# Altium PCB AudioBoxAmpV3-2.PcbDoc
Units mil, origin at the board's own origin, x right, y up, seen from the top; angles counter-clockwise.
Board outline 3662 x 3693 mil, 2 copper layers (Top Layer, Bottom Layer); 218 components, 164 nets, 728 pads, 0 vias.
Unrouted connection lines stored in the file: 516.
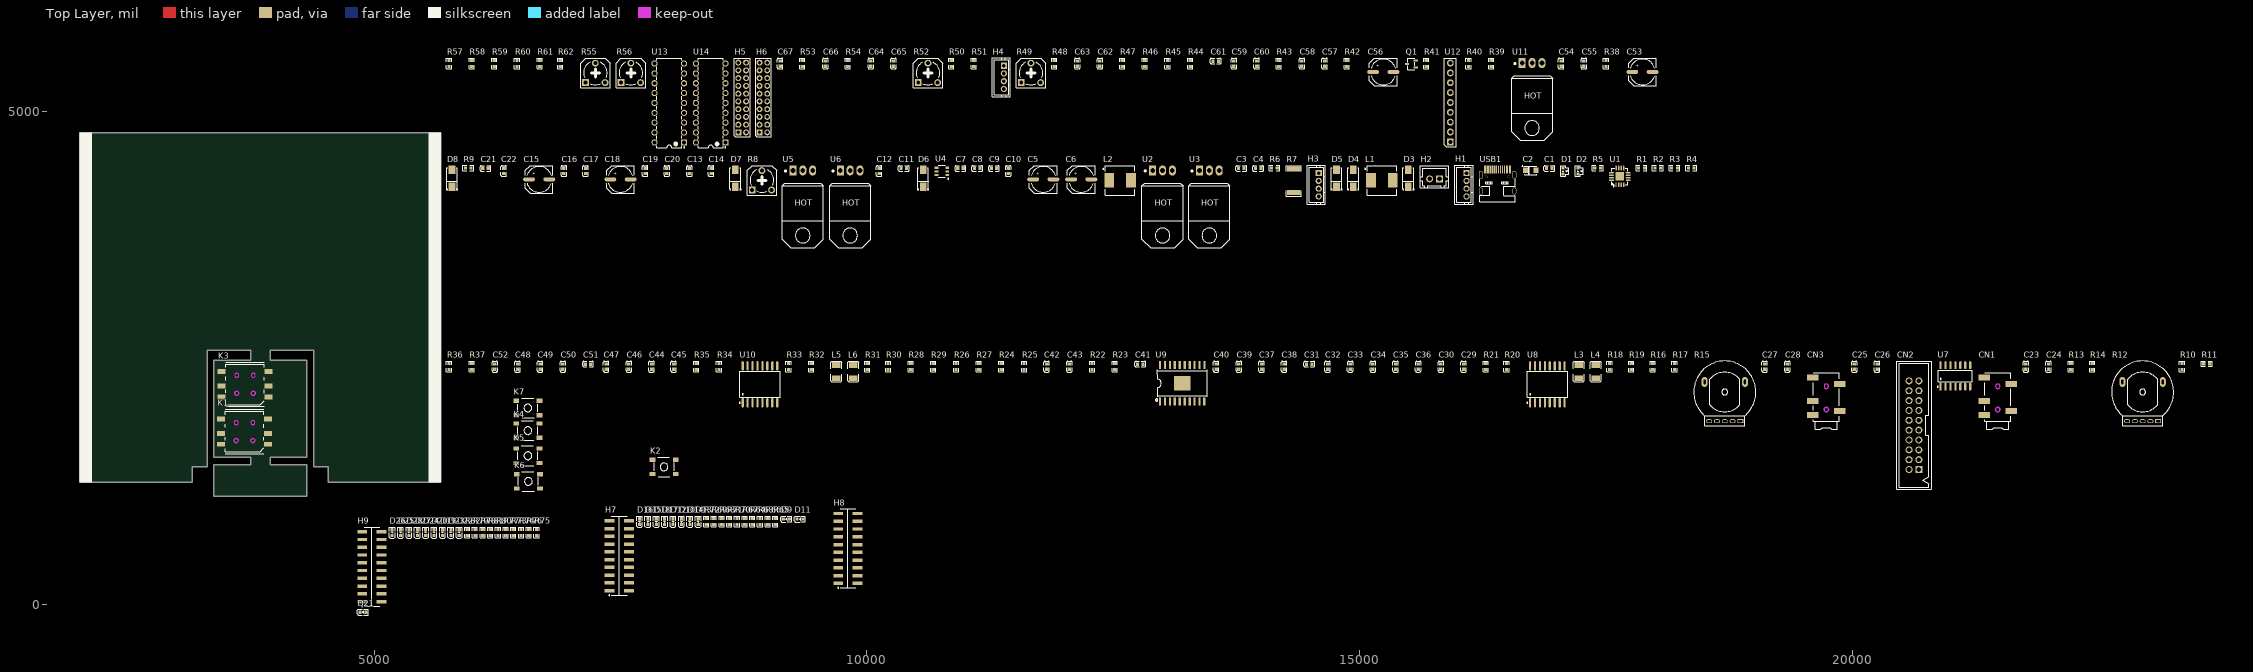
[diagram p0: Top Layer view]
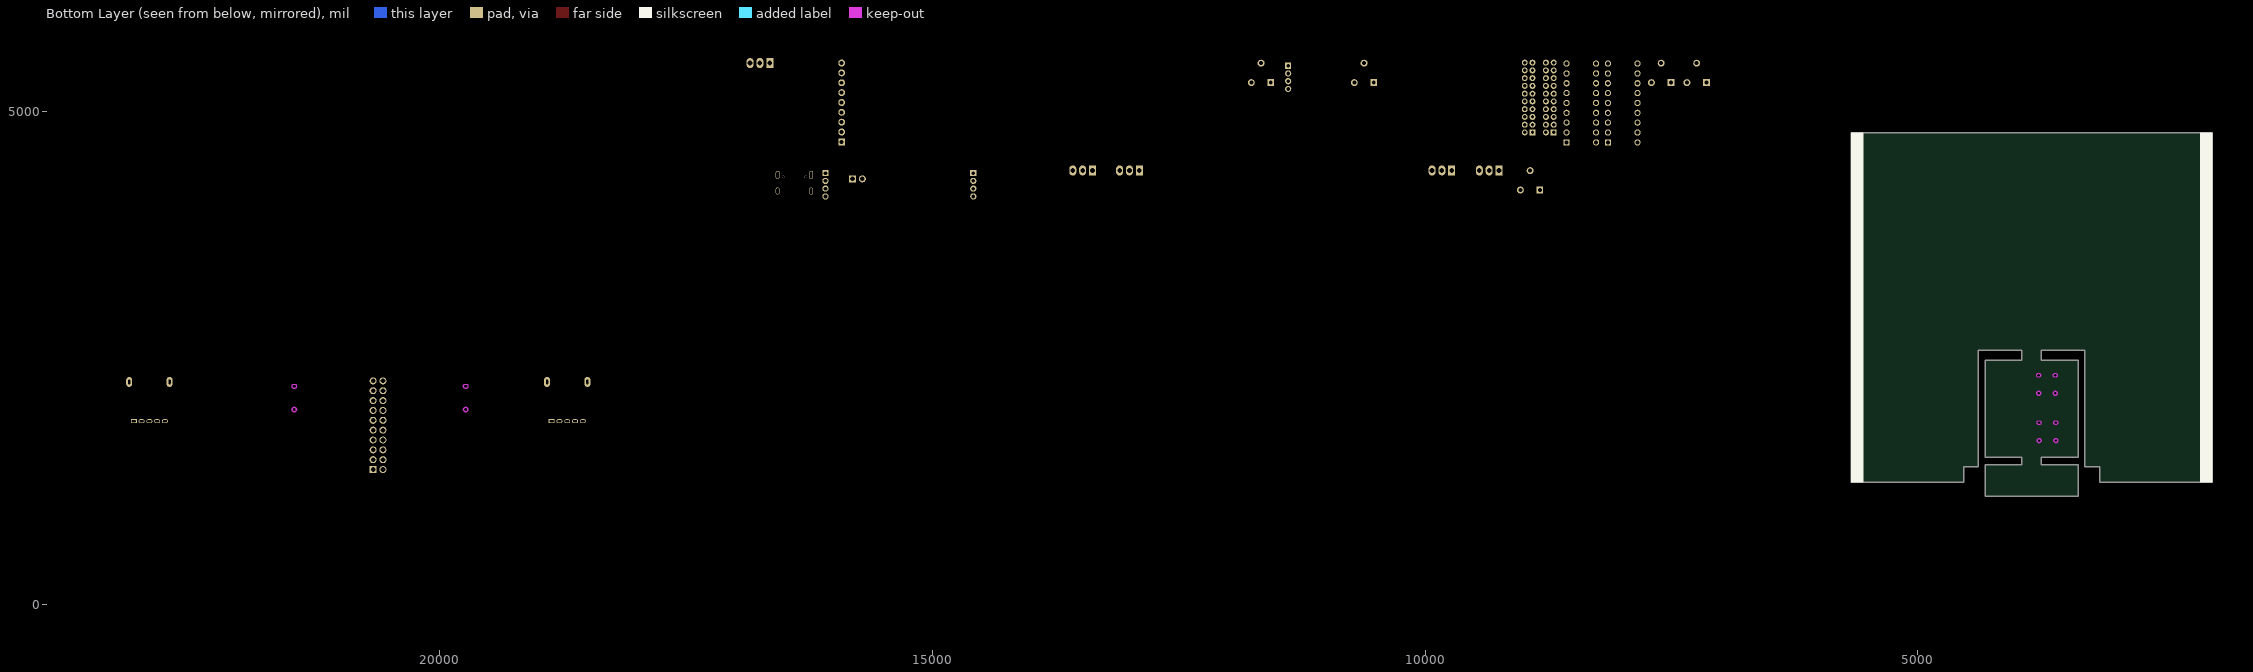
[diagram p1: Bottom Layer view, seen from below]

## Layer stack, top to bottom
Top Solder: solder mask 0.4, Solder Resist, Dk 3.5
Top Layer: signal copper 1.4
Dielectric 1: dielectric 12.6, FR-4, Dk 4.8
Bottom Layer: signal copper 1.4
Bottom Solder: solder mask 0.4, Solder Resist, Dk 3.5

## Board outline
2015,1240 3155,1240 3155,1400 3305,1400 3305,2581 3746,2581 3746,2481 3373.5,2481 3373.5,1497 3746,1497 3746,1417 3373.5,1417 3373.5,1097 4318.5,1097 4318.5,1417 3946,1417 3946,1497 4318.5,1497 4318.5,2481 3946,2481 3946,2581 4387,2581 4387,1400 4537,1400 4537,1240 5677,1240 5677,4790 2015,4790

## Design rules (kind name [scope] priority, off if disabled: settings)
Clearance [All] p1: gap=6 ignorepadtopadclearanceinfootprint=FALSE
PolygonConnect [All] p1: connectstyle=Relief reliefconductorwidth=10 reliefentries=4 polygonreliefangle="90 Angle" airgapwidth=10
RoutingVias [All] p1: holewidth=28 width=50 viastyle="Through Hole" minholewidth=28 minwidth=50 maxholewidth=28 maxwidth=50
SolderMaskExpansion [All] p1: expansion=4 istentingtop=FALSE
Width [All] p1: maxlimit=10 minlimit=10 preferedwidth=10
30 further rules are at their usual default settings.

## Classes and differential pairs
component class VU_LED: C53 C54 C55 C56 C57 C58 C59 C60 C61 C62 C63 C64 C65 C66 C67 H4 H5 H6 Q1 R38 R39 R40 R41 R42 R43 R44 R45 R46 R47 R48 R49 R50 R51 R52 R53 R54 R55 R56 R57 R58 R59 R60 R61 R62 U11 U12 U13 U14
component class Power: C1 C2 C3 C4 C5 C6 C7 C8 C9 C10 C11 C12 C13 C14 C15 C16 C17 C18 C19 C20 C21 C22 D1 D2 D3 D4 D5 D6 D7 D8 H1 H2 H3 L1 L2 R1 R2 R3 R4 R5 R6 R7 R8 R9 U1 U2 U3 U4 U5 U6 USB1
component class FrantPannel: D9 D10 D11 D12 D13 D14 D15 D16 D17 D18 D19 D20 D21 D22 D23 D24 D25 D26 D27 D28 H7 H8 H9 K1 K2 K3 K4 K5 K6 K7 R63 R64 R65 R66 R67 R68 R69 R70 R71 R72 R73 R74 R75 R76 R77 R78 R79 R80 R81 R82
component class Audio: C23 C24 C25 C26 C27 C28 C29 C30 C31 C32 C33 C34 C35 C36 C37 C38 C39 C40 C41 C42 C43 C44 C45 C46 C47 C48 C49 C50 C51 C52 CN1 CN2 CN3 L3 L4 L5 L6 R10 R11 R12 R13 R14 R15 R16 R17 R18 R19 R20 R21 R22 R23 R24 R25 R26 R27 R28 R29 R30 R31 R32 R33 R34 R35 R36 R37 U7 U8 U9 U10

## Components (designator, comment, footprint, x,y, rotation, side; value= is the part's Value field where it differs from the comment)
C1 "CAP" C0603 16925,4425 r0 top value=100nF
C2 "CAP_POL" CP1206 16735,4405 r0 top value=10uF
C3 "CAP" C0603 13800,4425 r0 top value=10uF
C4 "CAP" C0603 13970,4425 r0 top value=10uF
C5 "CAP_POL" CAP_SMD_6.3mm 11790,4315 r0 top value=220uF
C6 "CAP_POL" CAP_SMD_6.3mm 12175,4315 r0 top value=220uF
C7 "CAP" C0603 10950,4425 r0 top value=10uF
C8 "CAP" C0603 11120,4425 r0 top value=100nF
C9 "CAP" C0603 11290,4425 r0 top value=10uF
C10 "CAP" C0603 11435,4400 r90 top value=100nF
C11 "CAP" C0603 10375,4425 r0 top value=1uF
C12 "CAP" C0603 10125,4400 r90 top value=1uF
C13 "CAP" C0603 8200,4400 r90 top value=10uF
C14 "CAP" C0603 8420,4400 r90 top value=100nF
C15 "CAP_POL" CAP_SMD_6.3mm 6675,4315 r0 top value=220uF
C16 "CAP" C0603 6925,4400 r90 top value=10uF
C17 "CAP" C0603 7145,4400 r90 top value=100nF
C18 "CAP_POL" CAP_SMD_6.3mm 7500,4315 r0 top value=220uF
C19 "CAP" C0603 7750,4400 r90 top value=10uF
C20 "CAP" C0603 7970,4400 r90 top value=100nF
C21 "CAP" C0603 6130,4425 r0 top value=10uF
C22 "CAP" C0603 6315,4400 r90 top value=100nF
C23 "Cap" C0603 21760,2415 r90 top value=1nF
C24 "Cap" C0603 21990,2415 r90 top value=1nF
C25 "CAP" C0603 20020,2415 r90 top value=1uF
C26 "CAP" C0603 20250,2415 r90 top value=1uF
C27 "Cap" C0603 19110,2415 r90 top value=1nF
C28 "Cap" C0603 19340,2415 r90 top value=1nF
C29 "CAP" C0603 16055,2415 r90 top value=10uF
C30 "CAP" C0603 15825,2415 r90 top value=10uF
C31 "CAP" C0603 14490,2440 r0 top value=1uF
C32 "CAP" C0603 14675,2415 r90 top value=100nF
C33 "CAP" C0603 14905,2415 r90 top value=1uF
C34 "CAP" C0603 15135,2415 r90 top value=100nF
C35 "CAP" C0603 15365,2415 r90 top value=1uF
C36 "CAP" C0603 15595,2415 r90 top value=100nF
C37 "CAP" C0603 14005,2415 r90 top value=1uF
C38 "CAP" C0603 14235,2415 r90 top value=100nF
C39 "CAP" C0603 13775,2415 r90 top value=1uF
C40 "CAP" C0603 13545,2415 r90 top value=1uF
C41 "CAP" C0603 12775,2440 r0 top value=1uF
C42 "CAP" C0603 11825,2415 r90 top value=10uF
C43 "CAP" C0603 12055,2415 r90 top value=10uF
C44 "CAP" C0603 7815,2415 r90 top value=10uF
C45 "CAP" C0603 8040,2415 r90 top value=10uF
C46 "CAP" C0603 7585,2415 r90 top value=1uF
C47 "CAP" C0603 7355,2415 r90 top value=1uF
C48 "CAP" C0603 6455,2415 r90 top value=1uF
C49 "CAP" C0603 6685,2415 r90 top value=1uF
C50 "CAP" C0603 6915,2415 r90 top value=1uF
C51 "CAP" C0603 7170,2440 r0 top value=1uF
C52 "CAP" C0603 6225,2415 r90 top value=1uF
C53 "CAP_POL" CAP_SMD_6.3mm 17870,5405 r0 top value=100uF
C54 "CAP" C0603 17045,5490 r90 top value=10uF
C55 "CAP" C0603 17275,5490 r90 top value=2.2uF
C56 "CAP_POL" CAP_SMD_6.3mm 15240,5405 r0 top value=220uF
C57 "CAP" C0603 14645,5490 r90 top value=1uF
C58 "CAP" C0603 14415,5490 r90 top value=2.2uF
C59 "CAP" C0603 13725,5490 r90 top value=10uF
C60 "CAP" C0603 13955,5490 r90 top value=2.2uF
C61 "CAP" C0603 13540,5515 r0 top value=1nF
C62 "CAP" C0603 12365,5490 r90 top value=1nF
C63 "CAP" C0603 12135,5490 r90 top value=2.2uF
C64 "CAP" C0603 10040,5490 r90 top value=10uF
C65 "CAP" C0603 10270,5490 r90 top value=10uF
C66 "CAP" C0603 9580,5490 r90 top value=10uF
C67 "CAP" C0603 9120,5490 r90 top value=10uF
CN1 "Audio3.5Con" Audio3.5_3Pin 21475,2115 r90 top
CN2 "300S-20P" DC_20P_2.54 20625,1820 r90 top
CN3 "Audio3.5Con" Audio3.5_3Pin 19735,2115 r90 top
D1 "LED" LED0603_Side 17065,4400 r0 top
D2 "LED" LED0603_Side 17215,4400 r0 top
D3 "Diode SBD" SMA_L4.3 15495,4325 r90 top
D4 "Diode SBD" SMA_L4.3 14935,4325 r90 top
D5 "Diode SBD" SMA_L4.3 14765,4325 r90 top
D6 "Diode SBD" SMA_L4.3 10570,4325 r90 top
D7 "Diode SBD" SMA_L4.3 8665,4325 r90 top
D8 "Diode SBD" SMA_L4.3 5790,4325 r90 top
D9 "LED" LED0603 9182.61,867.26 r0 top
D10 "LED" LED0603 8118.43,842.3 r90 top
D11 "LED" LED0603 9321.91,867.26 r0 top
D12 "LED" LED0603 8033.37,842.3 r90 top
D13 "LED" LED0603 8288.54,842.3 r90 top
D14 "LED" LED0603 8203.48,842.3 r90 top
D15 "LED" LED0603 7778.2,842.3 r90 top
D16 "LED" LED0603 7693.14,842.3 r90 top
D17 "LED" LED0603 7948.31,842.3 r90 top
D18 "LED" LED0603 7863.25,842.3 r90 top
D19 "LED" LED0603 5693.48,732.3 r90 top
D20 "LED" LED0603 5608.43,732.3 r90 top
D21 "LED" LED0603 4886.6,-77.74 r0 top
D22 "LED" LED0603 5863.6,732.3 r90 top
D23 "LED" LED0603 5778.54,732.3 r90 top
D24 "LED" LED0603 5523.37,732.3 r90 top
D25 "LED" LED0603 5268.2,732.3 r90 top
D26 "LED" LED0603 5183.14,732.3 r90 top
D27 "LED" LED0603 5438.31,732.3 r90 top
D28 "LED" LED0603 5353.25,732.3 r90 top
H1 "Header_P4" PH_4Pin 16085,4260 r90 top
H2 "Header_P2" XH_2Pin 15760,4320 r0 top
H3 "Header_P4" PH_4Pin 14585,4260 r90 top
H4 "Header_P4" PH_4Pin 11390,5350 r90 top
H5 "Header_2*10P" H_2.0_10x2Pin 8735,5145 r90 top
H6 "Header_2*10P" H_2.0_10x2Pin 8950,5145 r90 top
H7 "Header_2*10P" H_2.0_2x10Pin_SMD 7487.7,495 r90 top
H8 "Header_2*10P" H_2.0_2x10Pin_SMD 9807.7,570 r90 top
H9 "Header_2*10P" H_2.0_2x10Pin_SMD 4977.7,385 r90 top
K1 "KEY_5P" KEY_5 3685,1755 r180 top
K2 "KEY_4P" KEY_4 7941.89,1397.16 r180 top
K3 "KEY_5P" KEY_5 3690,2235 r180 top
K4 "KEY_4P" KEY_4 6560,1765 r180 top
K5 "KEY_4P" KEY_4 6560,1510 r180 top
K6 "KEY_4P" KEY_4 6565,1250 r180 top
K7 "KEY_4P" KEY_4 6560,1995 r0 top
L1 "INDU" SMD_L7.1 15225,4305 r0 top
L2 "INDU" SMD_L7.1 12570,4305 r0 top
L3 "INDU" L1210 17225,2365 r90 top
L4 "INDU" L1210 17395,2365 r90 top
L5 "INDU" L1210 9690,2365 r90 top
L6 "INDU" L1210 9860,2365 r90 top
Q1 "SS8050" SOT-23-3 15525,5485 r0 top
R1 "Reg" R0603 17860,4430 r0 top value=1K
R2 "Reg" R0603 18025,4430 r0 top value=10K
R3 "Reg" R0603 18195,4430 r0 top value=1K
R4 "Reg" R0603 18365,4430 r0 top value=10K
R5 "Reg" R0603 17415,4430 r0 top value=320K
R6 "Reg" R0603 14135,4430 r0 top value=1K
R7 "Reg" R2512 14330,4300 r90 top value=0.05R
R8 "Res Tap" RES_TAP_HOR 8935,4305 r0 top value=10K
R9 "Reg" R0603 5955,4430 r0 top value=300R
R10 "Reg" R0603 23345,2415 r90 top value=1K
R11 "Reg" R0603 23595,2445 r0 top value=1K
R12 "Res_Tap_2" RES_TAP_5Pin 22945,2060 r0 top
R13 "Reg" R0603 22215,2415 r90 top value=500R
R14 "Reg" R0603 22435,2415 r90 top value=500R
R15 "Res_Tap_2" RES_TAP_5Pin 18705,2060 r0 top
R16 "Reg" R0603 17975,2415 r90 top value=500R
R17 "Reg" R0603 18195,2415 r90 top value=500R
R18 "Reg" R0603 17535,2415 r90 top value=1K
R19 "Reg" R0603 17755,2415 r90 top value=1K
R20 "Reg" R0603 16490,2415 r90 top value=5K
R21 "Reg" R0603 16280,2415 r90 top value=5K
R22 "Reg" R0603 12285,2415 r90 top value=10K
R23 "Reg" R0603 12515,2415 r90 top value=10K
R24 "Reg" R0603 11365,2415 r90 top value=50R
R25 "Reg" R0603 11595,2415 r90 top value=50R
R26 "Reg" R0603 10905,2415 r90 top value=500R
R27 "Reg" R0603 11135,2415 r90 top value=500R
R28 "Reg" R0603 10445,2415 r90 top value=500R
R29 "Reg" R0603 10675,2415 r90 top value=500R
R30 "Reg" R0603 10215,2415 r90 top value=1K
R31 "Reg" R0603 10005,2415 r90 top value=1K
R32 "Reg" R0603 9435,2415 r90 top value=1K
R33 "Reg" R0603 9205,2415 r90 top value=1K
R34 "Reg" R0603 8500,2415 r90 top value=5K
R35 "Reg" R0603 8270,2415 r90 top value=5K
R36 "Reg" R0603 5760,2415 r90 top value=10K
R37 "Reg" R0603 5990,2415 r90 top value=10K
R38 "Reg" R0603 17500,5490 r90 top value=680K
R39 "Reg" R0603 16335,5490 r90 top value=10K
R40 "Reg" R0603 16105,5490 r90 top value=10K
R41 "Reg" R0603 15675,5490 r90 top value=330K
R42 "Reg" R0603 14870,5490 r90 top value=330K
R43 "Reg" R0603 14180,5490 r90 top value=10K
R44 "Reg" R0603 13280,5490 r90 top value=220K
R45 "Reg" R0603 13050,5490 r90 top value=10K
R46 "Reg" R0603 12820,5490 r90 top value=100R
R47 "Reg" R0603 12590,5490 r90 top value=220K
R48 "Reg" R0603 11900,5490 r90 top value=10K
R49 "Res Tap" RES_TAP_HOR 11665,5395 r0 top value=1K
R50 "Reg" R0603 10855,5490 r90 top value=1K
R51 "Reg" R0603 11085,5490 r90 top value=100R
R52 "Res Tap" RES_TAP_HOR 10620,5395 r0 top value=1K
R53 "Reg" R0603 9345,5490 r90 top value=10K
R54 "Reg" R0603 9805,5490 r90 top value=10K
R55 "Res Tap" RES_TAP_HOR 7245,5395 r0 top value=50K
R56 "Res Tap" RES_TAP_HOR 7605,5395 r0 top value=50K
R57 "Reg" R0603 5760,5490 r90 top value=20K
R58 "Reg" R0603 5990,5490 r90 top value=500R
R59 "Reg" R0603 6220,5490 r90 top value=1K
R60 "Reg" R0603 6450,5490 r90 top value=20K
R61 "Reg" R0603 6680,5490 r90 top value=500R
R62 "Reg" R0603 6890,5490 r90 top value=1K
R63 "Reg" R0603 8915.98,842.47 r90 top value=1K
R64 "Reg" R0603 8837.96,842.47 r90 top value=1K
R65 "Reg" R0603 9072.01,842.47 r90 top value=1K
R66 "Reg" R0603 8993.99,842.47 r90 top value=1K
R67 "Reg" R0603 8759.94,842.47 r90 top value=1K
R68 "Reg" R0603 8525.9,842.47 r90 top value=1K
R69 "Reg" R0603 8447.88,842.47 r90 top value=1K
R70 "Reg" R0603 8681.93,842.47 r90 top value=1K
R71 "Reg" R0603 8603.91,842.47 r90 top value=1K
R72 "Reg" R0603 8369.86,842.47 r90 top value=1K
R73 "Reg" R0603 6413.02,732.47 r90 top value=1K
R74 "Reg" R0603 6491.03,732.47 r90 top value=1K
R75 "Reg" R0603 6647.06,732.47 r90 top value=1K
R76 "Reg" R0603 6569.05,732.47 r90 top value=1K
R77 "Reg" R0603 6335,732.47 r90 top value=1K
R78 "Reg" R0603 6100.95,732.47 r90 top value=1K
R79 "Reg" R0603 6022.94,732.47 r90 top value=1K
R80 "Reg" R0603 6256.98,732.47 r90 top value=1K
R81 "Reg" R0603 6178.97,732.47 r90 top value=1K
R82 "Reg" R0603 5944.92,732.47 r90 top value=1K
U1 "TP5000-QFN16" QFN-16_L4.0-W4.0-P0.65-BL-EP2.2 17640,4345 r0 top
U2 "LM78XX" TO-220-3_2.54_HOR 13000,4405 r0 top
U3 "LM78XX" TO-220-3_2.54_HOR 13475,4405 r0 top
U4 "SX1308" SOT-23-6 10760,4395 r0 top
U5 "LM79XX" TO-220-3_2.54_HOR 9350,4405 r0 top
U6 "LM79XX" TO-220-3_2.54_HOR 9830,4405 r0 top
U7 "OPA4134UA" SOIC-14 21045,2320 r0 top
U8 "DRV134UA" SOIC-16_9.5mm 16905,2235 r0 top
U9 "TPA6120A2DWP" HSOP-20 13200,2245 r0 top
U10 "DRV134UA" SOIC-16_9.5mm 8915,2235 r0 top
U11 "LM78XX" TO-220-3_2.54_HOR 16750,5495 r0 top
U12 "BA6138" SIP9-2.54 15920,5095 r90 top
U13 "XD3915" DIP-18 7995,5090 r90 top
U14 "XD3915" DIP-18 8415,5090 r90 top
USB1 "TYPEC-304-ACP16" USB-C-SMD_TYPE-C-16P 16400,4300 r0 top

## Footprints (in the part's own frame and the unit in brackets; to place one, negate y for a bottom-side part, rotate by r counter-clockwise, add the part's x,y. Pads: shape width x height; smd on the part's side, far side on the other; paste and mask are expansions set on the pad)
Audio3.5_3Pin [mil] "3.5mm3Pin音频接口"
  rect 60x120 smd: 1(-191,137.5) 2(191,137.5) 3(124,-137.5) 4(-49,137.5) 5(-151,-137.5)
  Keep-Out Layer board cut-out: 77,0 78.75,-8.8 83.74,-16.26 91.2,-21.25 100,-23 100,-23 108.8,-21.25 116.26,-16.26 121.25,-8.8 123,0 123,0 121.25,8.8 116.26,16.26 108.8,21.25 100,23 100,23 91.2,21.25 83.74,16.26 78.75,8.8 77,0
  Keep-Out Layer board cut-out: -136,-23 -144.8,-21.25 -152.26,-16.26 -157.25,-8.8 -159,0 -159,0 -157.25,8.8 -152.26,16.26 -144.8,21.25 -136,23 -136,23 -127.2,21.25 -119.74,16.26 -114.75,8.8 -113,0 -113,0 -114.75,-8.8 -119.74,-16.26 -127.2,-21.25 -136,-23
  Keep-Out Layer circle w10: c100,0 r23
  Keep-Out Layer circle w10: c-136,0 r23
  silkscreen extent -334,-130 238,130, body extent -389,-179 359,175, height 218
C0603 [mm]
  rect 0.8x0.9 smd: 1(-0.7,0) 2(0.7,0)
  silkscreen extent -1.41,-0.71 1.39,0.72, body extent -0.8,-0.41 0.8,0.45, height 0.89
CAP_SMD_6.3mm [mil] "SMD电容,10mm"
  oval 120x40 smd: 1(-103,0) 2(103,0)
  silkscreen extent -140,-140 140,140, body extent -137,-130 139,130, height 154
CP1206 [mm] "1206钽电容"
  rect 1.2x1.4 smd: 1(-1.305,0) 2(1.395,0)
  silkscreen extent -2.22,-1.14 1.65,1.33
DC_20P_2.54 [mm] "牛角座2.54，20P"
  rect 1.8x1.8 hole 1.2: 1(-11.43,-1.27)
  round 1.8 hole 1.2: 2(-11.43,1.27) 3(-8.89,-1.27) 4(-8.89,1.27) 5(-6.35,-1.27) 6(-6.35,1.27) 7(-3.81,-1.27) 8(-3.81,1.27) 9(-1.27,-1.27) 10(-1.27,1.27) 11(1.27,-1.27) 12(1.27,1.27) 13(3.81,-1.27) 14(3.81,1.27) 15(6.35,-1.27) 16(6.35,1.27) 17(8.89,-1.27) 18(8.89,1.27) 19(11.43,-1.27) 20(11.43,1.27)
  silkscreen extent -16.5,-4.4 16.5,4.4
DIP-18 [mm]
  rect 1.6x1.6 hole 1: 1(-10.16,-3.81)
  round 1.6 hole 1: 2(-7.62,-3.81) 3(-5.08,-3.81) 4(-2.54,-3.81) 5(0,-3.81) 6(2.54,-3.81) 7(5.08,-3.81) 8(7.62,-3.81) 9(10.16,-3.81) 10(10.16,3.81) 11(7.62,3.81) 12(5.08,3.81) 13(2.54,3.81) 14(0,3.81) 15(-2.54,3.81) 16(-5.08,3.81) 17(-7.62,3.81) 18(-10.16,3.81)
  silkscreen extent -11.58,-3.93 11.5,3.25, body extent -11,-3.81 11,4.06, height 5
H_2.0_2x10Pin_SMD [mil]
  rect 35x100 smd: 1(-354.15,98.7) 2(-275.45,98.7) 3(-196.75,98.7) 4(-118.05,98.7) 5(-39.35,98.7) 6(39.35,98.7) 7(118.05,98.7) 8(196.75,98.7) 9(275.45,98.7) 10(354.15,98.7) 11(354.15,-98.7) 12(275.45,-98.7) 13(196.75,-98.7) 14(118.05,-98.7) 15(39.35,-98.7) 16(-39.35,-98.7) 17(-118.05,-98.7) 18(-196.75,-98.7) 19(-275.45,-98.7) 20(-354.15,-98.7)
  silkscreen extent -405,-80 400,105
H_2.0_10x2Pin [mil] "2.0双排排针"
  rect 60x60 hole 35: 1(-354.15,39.35)
  round 60 hole 35: 2(-275.45,39.35) 3(-196.75,39.35) 4(-118.05,39.35) 5(-39.35,39.35) 6(39.35,39.35) 7(118.05,39.35) 8(196.75,39.35) 9(275.45,39.35) 10(354.15,39.35) 11(354.15,-39.35) 12(275.45,-39.35) 13(196.75,-39.35) 14(118.05,-39.35) 15(39.35,-39.35) 16(-39.35,-39.35) 17(-118.05,-39.35) 18(-196.75,-39.35) 19(-275.45,-39.35) 20(-354.15,-39.35)
  silkscreen extent -400,-80 400,80
HSOP-20 [mm]
  rect 0.6x2 smd: 1(-5.715,-4.7) 2(-4.445,-4.7) 3(-3.175,-4.7) 4(-1.905,-4.7) 5(-0.635,-4.7) 6(0.635,-4.7) 7(1.905,-4.7) 8(3.175,-4.7) 9(4.445,-4.7) 10(5.715,-4.7) 11(5.715,4.7) 12(4.445,4.7) 13(3.175,4.7) 14(1.905,4.7) 15(0.635,4.7) 16(-0.635,4.7) 17(-1.905,4.7) 18(-3.175,4.7) 19(-4.445,4.7) 20(-5.715,4.7)
  rect 4.32x3.81 smd: 21(0,0)
  silkscreen extent -6.9,-4.6 6.5,3.5
KEY_4 [mm] "贴片按键4引脚"
  rect 1.5x1.1 smd: 1(-3,1.85) 2(-3,-1.85) 3(3,1.85) 4(3,-1.85)
  silkscreen extent -2.58,-2.53 2.58,2.53
KEY_5 [mil] "五向开关"
  rect 80x50 smd: 1(-237,128) 2(-237,18) 3(-237,-128) 4(237,-128) 5(237,18) 6(237,128)
  Keep-Out Layer board cut-out: 64,-91 65.52,-98.65 69.86,-105.14 76.35,-109.48 84,-111 84,-111 91.65,-109.48 98.14,-105.14 102.48,-98.65 104,-91 104,-91 102.48,-83.35 98.14,-76.86 91.65,-72.52 84,-71 84,-71 76.35,-72.52 69.86,-76.86 65.52,-83.35 64,-91
  Keep-Out Layer board cut-out: -105,-91 -103.48,-98.65 -99.14,-105.14 -92.65,-109.48 -85,-111 -85,-111 -77.35,-109.48 -70.86,-105.14 -66.52,-98.65 -65,-91 -65,-91 -66.52,-83.35 -70.86,-76.86 -77.35,-72.52 -85,-71 -85,-71 -92.65,-72.52 -99.14,-76.86 -103.48,-83.35 -105,-91
  Keep-Out Layer board cut-out: -84,71 -91.65,72.52 -98.14,76.86 -102.48,83.35 -104,91 -104,91 -102.48,98.65 -98.14,105.14 -91.65,109.48 -84,111 -84,111 -76.35,109.48 -69.86,105.14 -65.52,98.65 -64,91 -64,91 -65.52,83.35 -69.86,76.86 -76.35,72.52 -84,71
  Keep-Out Layer board cut-out: 85,71 77.35,72.52 70.86,76.86 66.52,83.35 65,91 65,91 66.52,98.65 70.86,105.14 77.35,109.48 85,111 85,111 92.65,109.48 99.14,105.14 103.48,98.65 105,91 105,91 103.48,83.35 99.14,76.86 92.65,72.52 85,71
  Keep-Out Layer circle w10: c84,-91 r20
  Keep-Out Layer circle w10: c-85,-91 r20
  Keep-Out Layer circle w10: c85,91 r20
  Keep-Out Layer circle w10: c-84,91 r20
  silkscreen extent -197,-225 197,225
L1210 [mm]
  rect 1.474x2.22 smd: 1(-1.703,0) 2(1.703,0)
  silkscreen extent -2.67,-1.4 2.67,1.4
LED0603 [mm]
  rect 0.8x0.8 smd: 1(-0.799,-0.003) 2(0.799,0.004)
  silkscreen extent -1.49,-0.75 1.39,0.76, body extent -0.83,-0.34 0.83,0.38, height 0.68
LED0603_Side [mil]
  rect 32x32 smd: 1(0,30) 2(0,-30)
  silkscreen extent -25,-55 55,55
PH_4Pin [mm]
  rect 1.6x1.6 hole 0.96: 1(3,-0.005)
  round 1.6 hole 0.96: 2(1,0.005) 3(-1,0.005) 4(-3,0.005)
  silkscreen extent -5,-1.7 5,3
QFN-16_L4.0-W4.0-P0.65-BL-EP2.2 [mm] "QFN16"
  oval 0.35x1.27 smd: 1(-0.965,-2.154) 2(-0.315,-2.154) 3(0.335,-2.154) 4(0.986,-2.154) 9(0.991,2.154) 10(0.34,2.154) 11(-0.31,2.154) 12(-0.96,2.154)
  oval 1.27x0.35 smd: 5(2.154,-0.991) 6(2.154,-0.34) 7(2.154,0.31) 8(2.154,0.96) 13(-2.154,0.96) 14(-2.154,0.31) 15(-2.154,-0.34) 16(-2.154,-0.991)
  rect 2.2x2.2 smd: 17(0,0)
  silkscreen extent -2.11,-2.64 2.1,2.1
R0603 [mil]
  rect 31.75x34.02 smd: 1(-29.65,0) 2(29.65,0)
  silkscreen extent -55,-26 55,26, body extent -31,-17 32,17, height 19
R2512 [mil]
  rect 50.49x136.06 smd: 1(-120.72,0) 2(120.72,0)
  silkscreen extent -155,-77 155,77
RES_TAP_5Pin [mil] "双联电位器"
  rect 60x40 hole 20 slot 40 at 0 deg: 1(158,-199)
  oval 60x40 hole 20 slot 40 at 0 deg: 2(79,-199) 3(0,-199) 4(-79,-199) 5(-158,-199)
  oval 60x100 hole 45 slot 20 at 0 deg: 6(-205,199) 6(205,199)
  silkscreen extent -315,-244 315,412
RES_TAP_HOR [mil] "卧式电位器"
  rect 70x70 hole 40: 1(-98.5,-98.5)
  round 70 hole 40: 2(98.5,-98.5) 3(-0.5,98.5)
  silkscreen extent -150,-150 150,150
SIP9-2.54 [mil]
  rect 70x70 hole 40: 1(-400,0)
  round 70 hole 40: 2(-300,0) 3(-200,0) 4(-100,0) 5(0,0) 6(100,0) 7(200,0) 8(300,0) 9(400,0)
  silkscreen extent -450,-60 450,60
SMA_L4.3 [mm] "SMA_DIode"
  rect 2.185x1.7 smd: 1(-2.2,0) 2(2.2,0)
  silkscreen extent -3.11,-1.48 2.73,1.48, body extent -2.6,-1.3 2.6,1.3, height 2.4
SMD_L7.1 [mm]
  rect 2.5x3.8 smd: 1(-2.8,0) 2(2.8,0)
  silkscreen extent -4.44,-3.81 3.81,3.81, body extent -3.65,-3.3 3.65,3.3, height 4.95
SOIC-14 [mil]
  oval 22.6x80.24 smd: 1(-150,-109.02) 2(-100,-109.02) 3(-50,-109.02) 4(0,-109.02) 5(50,-109.02) 6(100,-109.02) 7(150,-109.02) 8(150,109.01) 9(100,109.01) 10(50,109.01) 11(0,109.01) 12(-50,109.01) 13(-100,109.01) 14(-150,109.01)
  silkscreen extent -185,-115 173,60
SOIC-16_9.5mm [mil]
  oval 22.6x94.51 smd: 1(-175,-187.02) 2(-125,-187.02) 3(-75,-187.02) 4(-25,-187.02) 5(25,-187.02) 6(75,-187.02) 7(125,-187.02) 8(175,-187.02) 9(175,187.02) 10(125,187.02) 11(75,187.02) 12(25,187.02) 13(-25,187.02) 14(-75,187.02) 15(-125,187.02) 16(-175,187.02)
  silkscreen extent -210,-193 206,131
SOT-23-3 [mm] "SOT-23-3"
  rect 1.07x0.532 smd: 1(1.135,-0.95) 2(1.135,0.95) 3(-1.135,0)
  silkscreen extent -0.88,-1.54 0.88,1.54, body extent -1.14,-1.46 1.2,1.46, height 1.08
SOT-23-6 [mm]
  rect 1x0.55 smd: 1(1.4,-0.95) 2(1.4,0) 3(1.4,0.95) 4(-1.4,0.95) 5(-1.4,0) 6(-1.4,-0.95)
  silkscreen extent -0.9,-2.03 1.78,1.55, body extent -1.21,-1.4 1.21,1.4, height 1.09
TO-220-3_2.54_HOR [mm]
  rect 1.8x2.6 hole 1.2: 1(-2.54,0.005)
  oval 1.8x2.6 hole 1.2: 2(0,0.005) 3(2.54,-0.005)
  silkscreen extent -5.3,-19.92 5.3,0.07
USB-C-SMD_TYPE-C-16P [mm] "全引脚USB TYPEC母座"
  rect 0.6x2.032 smd: A1B12(-3.2,2.893) A4B9(-2.4,2.893) B1A12(3.2,2.893) B4A9(2.4,2.893)
  rect 0.3x2.032 smd: A5(-1.25,2.893) A6(-0.25,2.893) A7(0.25,2.893) A8(1.25,2.893) B5(1.75,2.893) B6(0.75,2.893) B7(-0.75,2.893) B8(-1.75,2.893)
  oval 1x1.8 hole 0.6 slot 1.4 at 90 deg: EP(-4.32,-2.639) EP(4.32,-2.639)
  oval 1x2.1 hole 0.6 slot 1.7 at 90 deg: EP(-4.32,1.511) EP(4.32,1.511)
  round 0.65 hole 0.65 unplated: ""(-2.9,1.011) ""(2.9,1.021)
  silkscreen extent -4.55,-5.37 4.55,0.36, body extent -4.47,-5.32 4.47,2.58, height 3.13
XH_2Pin [mm]
  rect 1.8x1.8 hole 1.2: 1(1.27,0)
  round 1.8 hole 1.2: 2(-1.27,0)
  silkscreen extent -3.7,-2.35 3.7,3.4

## Part data
C1 C3 C4 C7 C8 C9 C10 C11 C12 C13 C14 C16 C17 C19 C20 C21 C22 C25 C26 C29 C30 C31 C32 C33 C34 C35 C36 C37 C38 C39 C40 C41 C42 C43 C44 C45 C46 C47 C48 C49 C50 C51 C52 C54 C55 C57 C58 C59 C60 C61 C62 C63 C64 C65 C66 C67: "Cap", BOM_Manufacturer="Huaxin S&T", BOM_Manufacturer Part=0603B103K101CT, BOM_Supplier=LCSC, BOM_Supplier Part=C302008, Contributor=LCSC, nameAlias=Capacitance, spicePre=C, spiceSymbolName=0603B103K101CT
C2 C5 C6 C15 C18 C53 C56: "极性电容"
C23 C24 C27 C28: library part CAP, BOM_Manufacturer="Huaxin S&T", BOM_Manufacturer Part=0603B103K101CT, BOM_Supplier=LCSC, BOM_Supplier Part=C302008, Contributor=LCSC, nameAlias=Capacitance, spicePre=C, spiceSymbolName=0603B103K101CT
CN1 CN3: library part AudioCon3, "3.5mm 3Pin 音频接口", BOM_JLCPCB Part Class="Extended Part", BOM_Manufacturer=G-Switch(品赞), BOM_Manufacturer Part=PJ-393, BOM_Supplier=LCSC, BOM_Supplier Part=C2837065, Contributor=LCSC, spicePre=C, spiceSymbolName=PJ-393_C2837065
CN2: library part DC-20P, "DC牛角座，20P", BOM_JLCPCB Part Class="Extended Part", BOM_Manufacturer="Shenzhen Cankemeng", BOM_Manufacturer Part=-, BOM_Supplier=LCSC, BOM_Supplier Part=C132442, Contributor=LCSC, spicePre=C, spiceSymbolName=300S-20P
D1 D2 D9 D10 D11 D12 D13 D14 D15 D16 D17 D18 D19 D20 D21 D22 D23 D24 D25 D26 D27 D28: library part LED0, LatestRevisionDate=08-Jul-2005, LatestRevisionNote="Mech Layer 1 removed.", PackageDescription="LED; 2 Leads", PackageReference=LED-0, Published=8-Jun-2000, Publisher="Altium Limited"
D3 D4 D5 D6 D7 D8: "Schottky Rectifier", ComponentLink1Description="Manufacturer Link", ComponentLink1URL=http://www.irf.com/, ComponentLink2Description=Datasheet, ComponentLink2URL=http://www.irf.com/product-info/datasheets/data/10tq.pdf, DatasheetVersion=PD-2.057B, LatestRevisionDate=17-Jul-2002, LatestRevisionNote="Re-released for DXP Platform.", Note="Terminal 2 is the TAB and is electrically connected to the cathode", PackageDescription="TO, Thru-Hole, Vertical, Heatsink Mounted; 3 In-Line Leads (1 Absent); Pitch 2.54 mm", PackageReference=TO-220AC, PackageVersion=Feb-1998, Published=8-Jun-2000, Publisher="Altium Limited"
H1 H3 H4: "4Pin排针"
H2: "2Pin排针"
H5 H6 H7 H8 H9: "2*10P连接器"
K1 K3: "五向开关"
K2 K4 K5 K6 K7: "4Pin按键"
L1 L2 L3 L4 L5 L6: library part IND, "电感", BOM_JLCPCB Part Class="Extended Part", BOM_Manufacturer="Sunltech Tech", BOM_Manufacturer Part=SLO0630H150MTT, BOM_Supplier=LCSC, BOM_Supplier Part=C182182, Contributor=LCSC, nameAlias=Inductance, spicePre=L, spiceSymbolName=SLO0630H150MTT
Q1: "NPN", BOM_Manufacturer=AnBon, BOM_Manufacturer Part=SS8050, BOM_Paste Type=recommend, BOM_Supplier=LCSC, BOM_Supplier Part=C541705, Contributor=LCSC, spicePre=Q, spiceSymbolName=SS8050_C541705
R1 R2 R3 R4 R5 R6 R7 R9 R10 R11 R13 R14 R16 R17 R18 R19 R20 R21 R22 R23 R24 R25 R26 R27 R28 R29 R30 R31 R32 R33 R34 R35 R36 R37 R38 R39 R40 R41 R42 R43 R44 R45 R46 R47 R48 R50 R51 R53 R54 R57 R58 R59 R60 R61 R62 R63 R64 R65 R66 R67 R68 R69 R70 R71 R72 R73 R74 R75 R76 R77 R78 R79 R80 R81 R82: library part Res, "电阻", BOM_Manufacturer="Viking Tech", BOM_Manufacturer Part=AR03BTCX1002A, BOM_Supplier=LCSC, BOM_Supplier Part=C465721, Contributor=LCSC, nameAlias="Resistance (Ohms)", spicePre=R, spiceSymbolName=AR03BTCX1002A
R8 R49 R52 R55 R56: "可调电阻", LatestRevisionDate=17-Jul-2002, LatestRevisionNote="Re-released for DXP Platform.", PackageDescription="Variable Resistor, Thru-Hole; 3 Leads", PackageReference=VR3, Published=24-Mar-1999, Publisher="Altium Limited", Set Position=0.5, Sim Note="Enter the Resistance value and the set point into parameter fields."
R12 R15: "双联电位器"
U1: BOM_JLCPCB Part Class="Extended Part", BOM_Manufacturer=TOPPOWER, BOM_Manufacturer Part=TP5000-QFN16, BOM_Supplier=LCSC, BOM_Supplier Part=C51699, spicePre=U, spiceSymbolName=TP5000-QFN16
U2 U3 U11: "三端稳压(正电压)", BOM_JLCPCB Part Class="Extended Part", BOM_Manufacturer=HGSEMI(华冠), BOM_Manufacturer Part=LM7812T, BOM_Supplier=LCSC, BOM_Supplier Part=C2902509, Contributor=LCSC, spicePre=U, spiceSymbolName=LM7812T
U4: "升压PWM", BOM_JLCPCB Part Class="Extended Part", BOM_Manufacturer=SX, BOM_Manufacturer Part=SX1308, BOM_Supplier=LCSC, BOM_Supplier Part=C78162, sourceId=g4Yg9rJ1j, spicePre=U, spiceSymbolName=SX1308, timeStamp=1472247539
U5 U6: "三端稳压(负电压)", BOM_JLCPCB Part Class="Extended Part", BOM_Manufacturer=HGSEMI(华冠), BOM_Manufacturer Part=LM7812T, BOM_Supplier=LCSC, BOM_Supplier Part=C2902509, Contributor=LCSC, spicePre=U, spiceSymbolName=LM7812T
U7: "耳放", BOM_JLCPCB Part Class="Extended Part", BOM_Manufacturer=TI(德州仪器), BOM_Manufacturer Part=OPA4134UA, BOM_Supplier=LCSC, BOM_Supplier Part=C2832240, Contributor=LCSC, spicePre=U, spiceSymbolName=OPA4134UA
U8 U10: "音频差分放大器", BOM_JLCPCB Part Class="Extended Part", BOM_Manufacturer=TI(德州仪器), BOM_Manufacturer Part=DRV134UA, BOM_Supplier=LCSC, BOM_Supplier Part=C1519988, Contributor=LCSC, spicePre=U, spiceSymbolName=DRV134UA
U9: library part TPA6120, "耳放", BOM_Manufacturer=TI(德州仪器), BOM_Manufacturer Part=TPA6120A2DWP, BOM_Supplier=LCSC, BOM_Supplier Part=C2871054, Contributor=LCSC, link=https://atta.szlcsc.comnull, spicePre=U, spiceSymbolName=TPA6120A2DWP
U12: "对数放大器"
U13 U14: library part LM3915, "电平指示", BOM_JLCPCB Part Class="Extended Part", BOM_Manufacturer=XINLUDA(信路达), Frequency=-, BOM_Manufacturer Part=XD3915, BOM_Supplier=LCSC, BOM_Supplier Part=C609778, Contributor=LCSC, spicePre=U, spiceSymbolName=XD3915
USB1: library part USB_TYPEC_12P, "全引脚USB TYPEC母座", BOM_JLCPCB Part Class="Extended Part", BOM_Manufacturer=XUNPU(讯普), BOM_Manufacturer Part=TYPEC-304-ACP16, BOM_Supplier=LCSC, BOM_Supplier Part=C2982555, Contributor=LCSC, spicePre=U, spiceSymbolName=TYPEC-304-ACP16

## Nets (pads, with @x,y where several pads share a name; then routed paths per layer and width w, separated by ;. In a path a pad name is that pad's centre, name@x,y a point inside that pad or via, vN(x,y) a via of type N, cw(c..) or ccw(c..) an arc to the next point about the centre after c; other vN are vias at no path point)
A_LF+: C48.1 R17.1 R26.1
A_LF-: C49.1 R14.2 R28.1
A_LIN: C47.1 CN1.2 CN1.3 CN2.11 R36.2
A_LIN0+: C28.2 R15.3 R19.2 U7.9
A_LIN0-: C24.2 R11.2 R15.2 U7.13
A_LIN+: CN2.19 L6.1 R15.4
A_LIN-: CN2.17 L5.2 R15.5
A_LOUT: CN2.7 CN3.2 CN3.3 R24.1
A_LOUT0: C42.1 C59.1 C64.1 R32.1 U9.2
A_RF+: C50.1 R16.1 R27.1
A_RF-: C51.1 R13.2 R29.1
A_RIN: C40.1 CN1.4 CN2.9 R22.2
A_RIN0+: C27.1 R12.3 R18.1 U7.6
A_RIN0-: C23.1 R10.1 R12.2 U7.2
A_RIN+: CN2.15 L4.2 R12.4
A_RIN-: CN2.13 L3.2 R12.5
A_ROUT: CN2.5 CN3.4 R25.2
A_ROUT0: C43.2 C54.1 C65.1 R33.1 U9.19
A_VLB12V+: C6.1 C9.1 C10.1 C33.2 C34.2 C35.2 C36.2 CN2.2 U3.3 U9.3 U9.18
A_VLB12V-: C18.2 C19.1 C20.1 C31.2 C32.2 C37.2 C38.2 CN2.4 U6.3 U9.1 U9.20
FP_12V: H7.18 H7.19 H7.20 H9.18 H9.19 H9.20 R63.2 R64.2 R65.2 R66.2 R67.2 R68.2 R69.2 R70.2 R71.2 R72.2 R73.2 R74.2 R75.2 R76.2 R77.2 R78.2 R79.2 R80.2 R81.2 R82.2
FP_BLE_KB: H8.15 K1.4
FP_BLE_KC: H8.17 K1.3
FP_BLE_KIN: H8.20 K1.1 K2.1
FP_BLE_KL: H8.19 K1.2
FP_BLE_KM: H8.14 K2.2
FP_BLE_KR: H8.18 K1.5
FP_BLE_KT: H8.16 K1.6
FP_USB_KB: H8.6 K3.4
FP_USB_KC: H8.4 K3.3
FP_USB_KEQ: H8.9 K5.2
FP_USB_KIN: H8.1 K3.1 K4.1 K5.1 K6.1 K7.1
FP_USB_KL: H8.2 K3.2
FP_USB_KPM: H8.7 K4.2
FP_USB_KR: H8.3 K3.5
FP_USB_KRM: H8.8 K6.2
FP_USB_KSTOP: H8.10 K7.2
FP_USB_KT: H8.5 K3.6
GND: C1.2 C2.2 C3.2 C4.2 C5.2 C6.2 C7.2 C8.2 C9.2 C10.2 C11.2 C13.2 C14.2 C15.1 C16.2 C17.2 C18.1 C19.2 C20.2 C21.2 C22.2 C25.1 C26.1 C31.1 C32.1 C33.1 C34.1 C35.1 C36.1 C37.1 C38.1 C39.2 C41.1 C46.2 C48.2 C49.2 C50.2 C51.2 C52.1 C53.2 C55.1 C56.2 C57.2 C60.1 C61.1 C62.2 C66.2 C67.2 CN1.1 CN1.5 CN2.14 CN2.16 CN2.18 CN2.20 CN3.1 CN3.5 D4.2 D8.1 H1.1 H1.2 H2.1 H3.1 H4.1 H4.2 H5.11 H5.12 H5.13 H5.14 H5.15 H5.16 H5.17 H6.11 H6.12 H6.13 H6.14 H6.15 H6.16 H6.17 H7.11 H7.12 H7.13 H7.14 H7.15 H7.16 H7.17 H9.11 H9.12 H9.13 H9.14 H9.15 H9.16 H9.17 Q1.2 R5.2 R9.1 R12.1 R12.6 R15.1 R15.6 R20.2 R21.1 R22.1 R23.1 R30.1 R31.1 R34.2 R35.1 R36.1 R37.1 R40.1 R41.1 R42.1 R44.2 R45.1 R47.1 R49.1 R52.1 R53.1 R54.1 R55.2 R56.2 R58.2 R59.2 R61.2 R62.2 U1.6 U1.7 U1.11 U1.17 U2.2 U3.2 U4.2 U5.1 U6.1 U7.3 U7.5 U7.10 U7.12 U8.5 U9.21 U10.5 U11.2 U12.5 U13.2 U13.4 U13.8 U14.2 U14.4 U14.8 USB1.A1B12 USB1.B1A12 USB1.EP
NetC1_1: C1.1 U1.10
NetC4_1: C4.1 L1.1 R7.2 U1.8
NetC12_2: C12.2 D7.1 D8.2
NetC23_2: C23.2 R10.2 R13.1 U7.1
NetC24_1: C24.1 R11.1 R14.1 U7.14
NetC27_2: C27.2 R16.2 R18.2 U7.7
NetC28_1: C28.1 R17.2 R19.1 U7.8
NetC29_1: C29.1 R21.2 U8.13 U8.14
NetC29_2: C29.2 L4.1
NetC30_1: C30.1 R20.1 U8.3 U8.4
NetC30_2: C30.2 L3.1
NetC40_2: C40.2 R23.2 U8.6
NetC42_2: C42.2 R24.2
NetC43_1: C43.1 R25.1
NetC44_1: C44.1 R34.1 U10.3 U10.4
NetC44_2: C44.2 L5.1
NetC45_1: C45.1 R35.2 U10.13 U10.14
NetC45_2: C45.2 L6.2
NetC47_2: C47.2 R37.2 U10.6
NetC53_1: C53.1 Q1.1 R38.2
NetC55_2: C55.2 R41.2 U12.3
NetC58_1: C58.1 C61.2 R43.1 R44.1
NetC58_2: C58.2 U12.4
NetC60_2: C60.2 R42.2 U12.8
NetC62_1: C62.1 C63.1 R47.2 R48.1
NetC63_2: C63.2 U12.6
NetD1_2: D1.2 R1.1
NetD2_2: D2.2 R3.1
NetD4_1: D4.1 L1.2 U1.3 U1.4 U1.5
NetD9_1: D9.1 H7.10
NetD9_2: D9.2 R63.1
NetD10_1: D10.1 H7.9
NetD10_2: D10.2 R64.1
NetD11_1: D11.1 H7.8
NetD11_2: D11.2 R65.1
NetD12_1: D12.1 H7.7
NetD12_2: D12.2 R66.1
NetD13_1: D13.1 H7.6
NetD13_2: D13.2 R67.1
NetD14_1: D14.1 H7.5
NetD14_2: D14.2 R68.1
NetD15_1: D15.1 H7.4
NetD15_2: D15.2 R69.1
NetD16_1: D16.1 H7.3
NetD16_2: D16.2 R70.1
NetD17_1: D17.1 H7.2
NetD17_2: D17.2 R71.1
NetD18_1: D18.1 H7.1
NetD18_2: D18.2 R72.1
NetD19_1: D19.1 H9.10
NetD19_2: D19.2 R73.1
NetD20_1: D20.1 H9.9
NetD20_2: D20.2 R74.1
NetD21_1: D21.1 H9.8
NetD21_2: D21.2 R75.1
NetD22_1: D22.1 H9.7
NetD22_2: D22.2 R76.1
NetD23_1: D23.1 H9.6
NetD23_2: D23.2 R77.1
NetD24_1: D24.1 H9.5
NetD24_2: D24.2 R78.1
NetD25_1: D25.1 H9.4
NetD25_2: D25.2 R79.1
NetD26_1: D26.1 H9.3
NetD26_2: D26.2 R80.1
NetD27_1: D27.1 H9.2
NetD27_2: D27.2 R81.1
NetD28_1: D28.1 H9.1
NetD28_2: D28.2 R82.1
NetH3_3: H3.3 R6.2
NetH4_3: H4.3 R50.2
NetH5_1: H5.1 U13.1
NetH5_2: H5.2 U13.18
NetH5_3: H5.3 U13.17
NetH5_4: H5.4 U13.16
NetH5_5: H5.5 U13.15
NetH5_6: H5.6 U13.14
NetH5_7: H5.7 U13.13
NetH5_8: H5.8 U13.12
NetH5_9: H5.9 U13.11
NetH5_10: H5.10 U13.10
NetH6_1: H6.1 U14.1
NetH6_2: H6.2 U14.18
NetH6_3: H6.3 U14.17
NetH6_4: H6.4 U14.16
NetH6_5: H6.5 U14.15
NetH6_6: H6.6 U14.14
NetH6_7: H6.7 U14.13
NetH6_8: H6.8 U14.12
NetH6_9: H6.9 U14.11
NetH6_10: H6.10 U14.10
NetQ1_3: Q1.3 R39.1 U12.1
NetR5_1: R5.1 U1.12
NetR26_2: R26.2 R30.2 U9.4
NetR27_2: R27.2 R31.2 U9.17
NetR28_2: R28.2 R32.2 U9.5
NetR29_2: R29.2 R33.2 U9.16
NetR55_3: R55.3 U13.5
NetR56_3: R56.3 U14.5
NetR57_1: R57.1 R58.1 U13.6
NetR59_1: R59.1 U13.7
NetR60_1: R60.1 R61.1 U14.6
NetR62_1: R62.1 U14.7
PWR_BAT: C3.1 D5.2 H2.2 R7.1 U1.9
PWR_CHRG_STAT: D1.1 H1.3 R2.1 U1.15
PWR_DC_FB: R8.1 R8.3 R9.2 U4.3
PWR_DC_SW: C12.1 D6.2 L2.1 U4.1
PWR_DC_V5+: C5.1 C7.1 C8.1 C25.2 C39.1 C46.1 CN2.6 U2.3 U7.4 U8.12 U10.12
PWR_DC_V5-: C15.2 C16.1 C17.1 C26.2 C41.2 C52.2 CN2.8 U5.3 U7.11 U8.11 U10.11
PWR_DC_VHN: C21.1 C22.1 D7.2 U5.2 U6.2
PWR_DC_VHP: C13.1 C14.1 D6.1 R8.2 U2.1 U3.1 U11.1
PWR_STDBY_STAT: D2.1 H1.4 R4.1 U1.14
PWR_USB_DM: CN2.3 USB1.A7 USB1.B7
PWR_USB_DP: CN2.1 USB1.A6 USB1.B6
PWR_VIN: C2.1 D3.2 R1.2 R2.2 R3.2 R4.2 U1.1 U1.2 U1.13 U1.16 USB1.A4B9 USB1.B4A9
PWR_VOUT: CN2.12 D3.1 D5.1 H3.4 R6.1
PWR_VSYS: C11.1 CN2.10 H3.2 L2.2 R50.1 U4.4 U4.5
VU_12V: C56.1 C57.1 C66.1 C67.1 H5.18 H5.19 H5.20 H6.18 H6.19 H6.20 R38.1 R39.2 R57.2 R60.2 U11.3 U12.9 U13.3 U13.9 U14.3 U14.9
VU_LED_LSIG: C64.2 R53.2 R55.1
VU_LED_RSIG: C65.2 R54.2 R56.1
VU_LSIG: C59.2 R45.2 R48.2
VU_LVUOUT: R51.2 R52.2 R52.3 U12.7
VU_OUT: H4.4 R46.1 R51.1
VU_RSIG: C54.2 R40.2 R43.2
VU_RVUOUT: R46.2 R49.2 R49.3 U12.2
pads on no net: H8.11 H8.12 H8.13 K2.3 K2.4 K4.3 K4.4 K5.3 K5.4 K6.3 K6.4 K7.3 K7.4 U4.6 U8.1 U8.2 U8.7 U8.8 U8.9 U8.10 U8.15 U8.16 U9.6 U9.7 U9.8 U9.9 U9.10 U9.11 U9.12 U9.13 U9.14 U9.15 U10.1 U10.2 U10.7 U10.8 U10.9 U10.10 U10.15 U10.16 USB1. USB1.A5 USB1.A8 USB1.B5 USB1.B8

## Polygon pours and split planes (outlines as drawn)
no net on Bottom Overlay "NONET_L-01_P-001" (solid): 2015,4790 2135,4790 2135,1240 2015,1240
no net on Bottom Overlay "NONET_L-01_P-001" (solid): 5555,4790 5675,4790 5675,1240 5555,1240
no net on Top Overlay "NONET_L-01_P-001" (solid): 2015,4790 2135,4790 2135,1240 2015,1240
no net on Top Overlay "NONET_L-01_P-001" (solid): 5555,4790 5675,4790 5675,1240 5555,1240

## Silkscreen, mask and mechanical layers (free items; w line width, h text height)
Mechanical 1:
  lines w10: 2015,1240 2015,4790 5677,4790 5677,1240 4537,1240 4537,1400 4387,1400 4387,2581 4318.5,2581 3946,2581 3946,2481 4318.5,2481 4318.5,1497 3946,1497 3946,1417 4318.5,1417 4318.5,1097 3373.5,1097 3373.5,1417 3746,1417 3746,1497 3373.5,1497 3373.5,2481 3746,2481 3746,2581 3373.5,2581 3305,2581 3305,1400 3155,1400 3155,1240 2015,1240

## Text inside footprints (layer, text, board x,y; h text height)
C5: Top Overlay "+" at 11720,4360 h30
C6: Top Overlay "+" at 12105,4360 h30
C15: Top Overlay "+" at 6605,4360 h30
C18: Top Overlay "+" at 7430,4360 h30
C53: Top Overlay "+" at 17800,5450 h30
C56: Top Overlay "+" at 15170,5450 h30
U2: Top Overlay "HOT" at 12920,4045 h60
U3: Top Overlay "HOT" at 13395,4045 h60
U5: Top Overlay "HOT" at 9270,4045 h60
U6: Top Overlay "HOT" at 9750,4045 h60
U11: Top Overlay "HOT" at 16670,5135 h60